# Altium PCB PCB1.PcbDoc
Units mm, origin at the board's own origin, x right, y up, seen from the top; angles counter-clockwise.
Board outline 152.4 x 101.6 mm, 2 copper layers (Top Layer, Bottom Layer); 2 components, 0 nets, 84 pads, 0 vias.
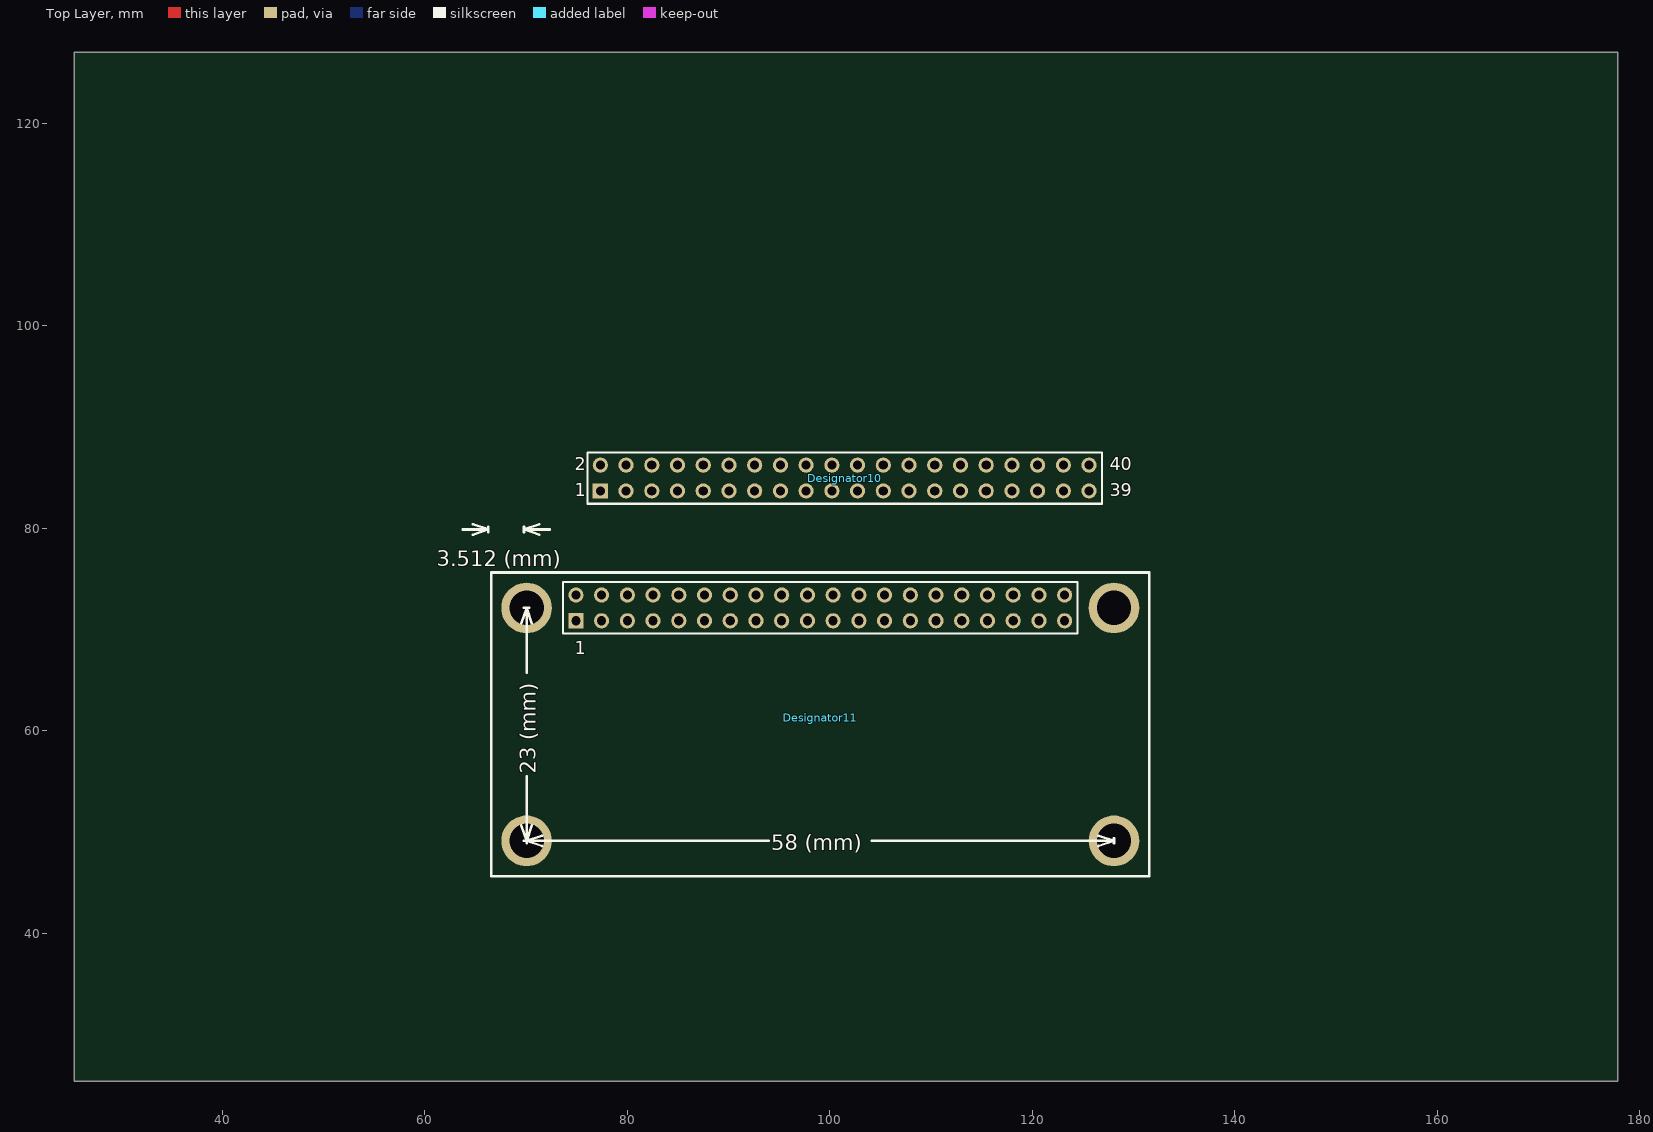
[diagram p0: Top Layer view]
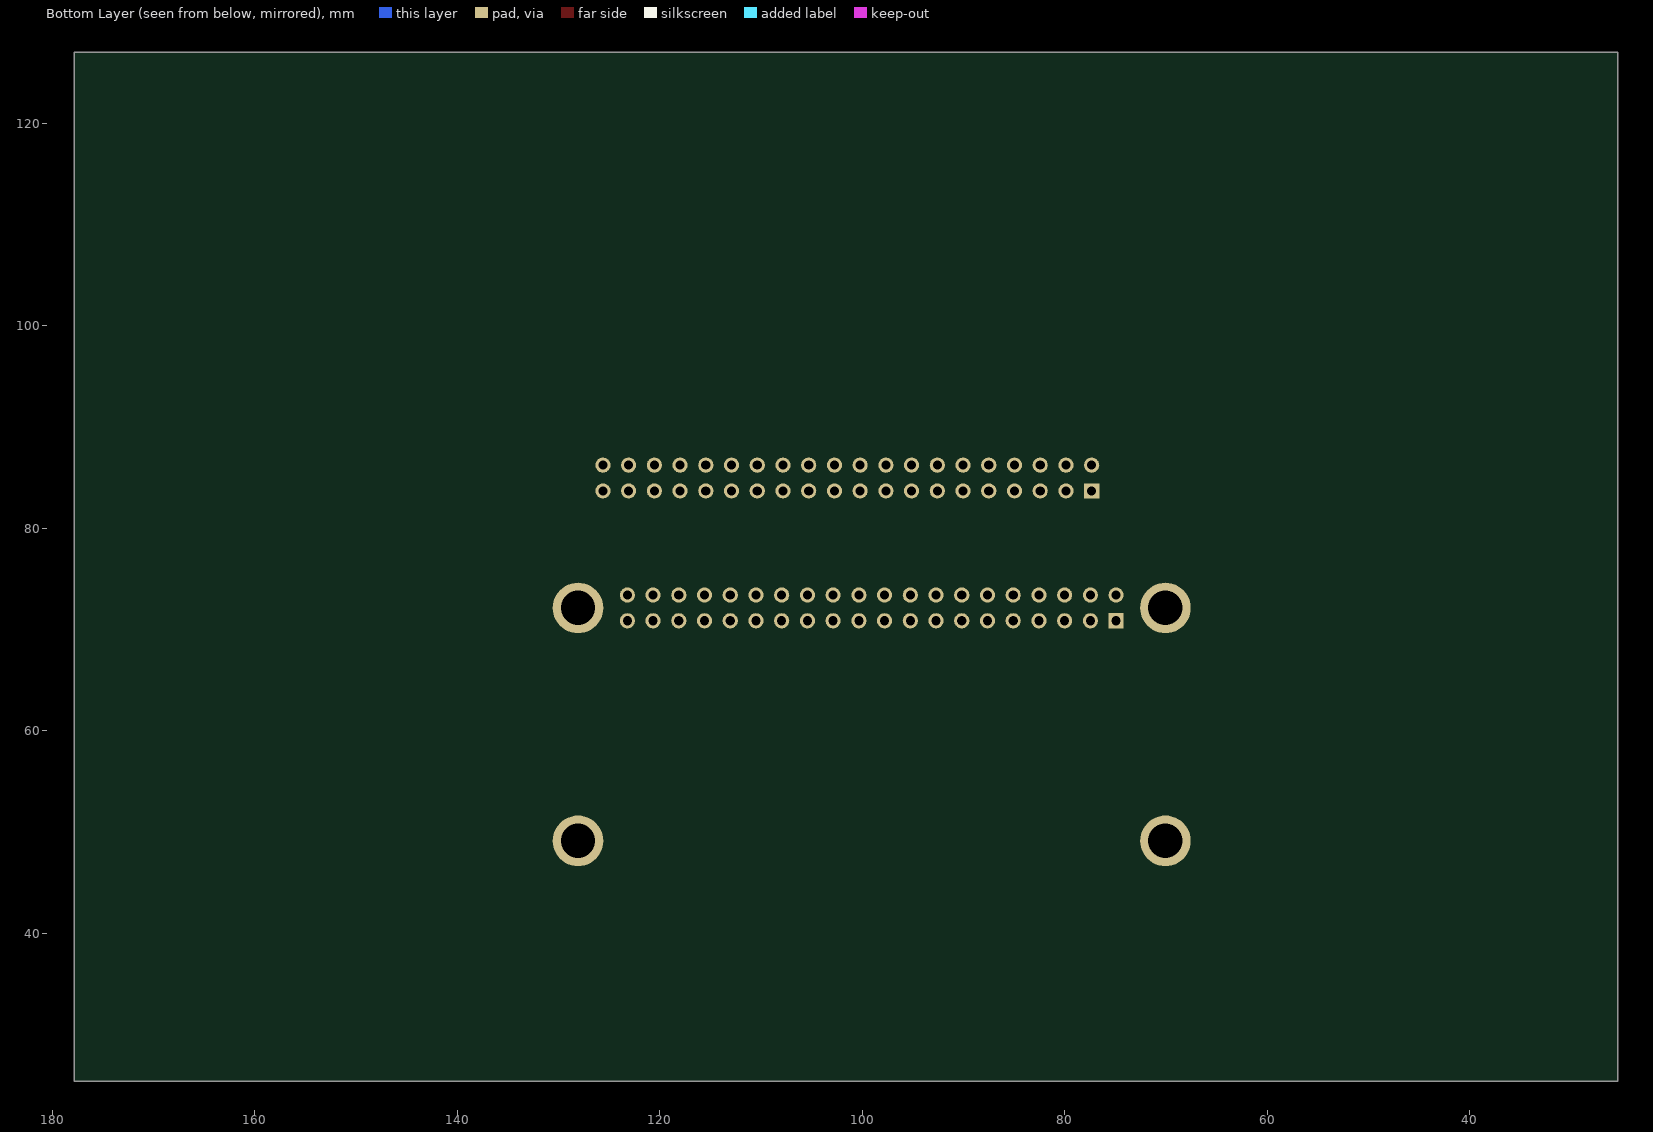
[diagram p1: Bottom Layer view, seen from below]

## Layer stack, top to bottom
Top Solder: solder mask 0.0102, Solder Resist, Dk 3.5
Top Layer: signal copper 0.0356
Dielectric 1: dielectric 0.32, FR-4, Dk 4.8
Bottom Layer: signal copper 0.0356
Bottom Solder: solder mask 0.0102, Solder Resist, Dk 3.5

## Board outline
25.4,25.4 177.8,25.4 177.8,127 25.4,127

## Design rules (kind name [scope] priority, off if disabled: settings)
Clearance [All] p1: gap=0.254 ignorepadtopadclearanceinfootprint=FALSE except(0: Arc-Hole Track-Hole SMDPad-Hole THPad-Hole Via-Hole Fill-Hole Poly-Hole Region-Hole Text-Hole)
PolygonConnect [All] p1: connectstyle=Relief reliefconductorwidth=0.254 reliefentries=4 polygonreliefangle="90 Angle" airgapwidth=0.254
RoutingVias [All] p1: holewidth=0.711 width=1.27 viastyle="Through Hole" minholewidth=0.711 minwidth=1.27 maxholewidth=0.711 maxwidth=1.27
SolderMaskExpansion [All] p1: expansion=0.102
Width [All] p1: maxlimit=0.254 minlimit=0.254 preferedwidth=0.254
30 further rules are at their usual default settings.

## Components (designator, comment, footprint, x,y, rotation, side; value= is the part's Value field where it differs from the comment)
Designator10 "Comment" HDR2X20 77.343,83.693 r0 top
Designator11 "Comment" RPi_Zero_2_W 99.06,72.136 r0 top

## Footprints (in the part's own frame and the unit in brackets; to place one, negate y for a bottom-side part, rotate by r counter-clockwise, add the part's x,y. Pads: shape width x height; smd on the part's side, far side on the other; paste and mask are expansions set on the pad)
HDR2X20 [mm] "Connector; Header; 20x2 Position"
  rect 1.5x1.5 hole 0.9: 1(0,0)
  round 1.5 hole 0.9: 2(0,2.54) 3(2.54,0) 4(2.54,2.54) 5(5.08,0) 6(5.08,2.54) 7(7.62,0) 8(7.62,2.54) 9(10.16,0) 10(10.16,2.54) 11(12.7,0) 12(12.7,2.54) 13(15.24,0) 14(15.24,2.54) 15(17.78,0) 16(17.78,2.54) 17(20.32,0) 18(20.32,2.54) 19(22.86,0) 20(22.86,2.54) 21(25.4,0) 22(25.4,2.54) 23(27.94,0) 24(27.94,2.54) 25(30.48,0) 26(30.48,2.54) 27(33.02,0) 28(33.02,2.54) 29(35.56,0) 30(35.56,2.54) 31(38.1,0) 32(38.1,2.54) 33(40.64,0) 34(40.64,2.54) 35(43.18,0) 36(43.18,2.54) 37(45.72,0) 38(45.72,2.54) 39(48.26,0) 40(48.26,2.54)
  silkscreen extent -1.27,-1.27 49.53,3.81
RPi_Zero_2_W [mm]
  rect 1.5x1.5 hole 0.9: 1(-24.13,-1.27)
  round 5 hole 3.4: 2(-29,0) 3(29,0) 4(-29,-23) 5(29,-23)
  round 1.5 hole 0.9: 2(-24.13,1.27) 3(-21.59,-1.27) 4(-21.59,1.27) 5(-19.05,-1.27) 6(-19.05,1.27) 7(-16.51,-1.27) 8(-16.51,1.27) 9(-13.97,-1.27) 10(-13.97,1.27) 11(-11.43,-1.27) 12(-11.43,1.27) 13(-8.89,-1.27) 14(-8.89,1.27) 15(-6.35,-1.27) 16(-6.35,1.27) 17(-3.81,-1.27) 18(-3.81,1.27) 19(-1.27,-1.27) 20(-1.27,1.27) 21(1.27,-1.27) 22(1.27,1.27) 23(3.81,-1.27) 24(3.81,1.27) 25(6.35,-1.27) 26(6.35,1.27) 27(8.89,-1.27) 28(8.89,1.27) 29(11.43,-1.27) 30(11.43,1.27) 31(13.97,-1.27) 32(13.97,1.27) 33(16.51,-1.27) 34(16.51,1.27) 35(19.05,-1.27) 36(19.05,1.27) 37(21.59,-1.27) 38(21.59,1.27) 39(24.13,-1.27) 40(24.13,1.27)
  silkscreen extent -32.5,-26.5 32.5,3.5

## Nets (pads, with @x,y where several pads share a name; then routed paths per layer and width w, separated by ;. In a path a pad name is that pad's centre, name@x,y a point inside that pad or via, vN(x,y) a via of type N, cw(c..) or ccw(c..) an arc to the next point about the centre after c; other vN are vias at no path point)
pads on no net: Designator10.1 Designator10.2 Designator10.3 Designator10.4 Designator10.5 Designator10.6 Designator10.7 Designator10.8 Designator10.9 Designator10.10 Designator10.11 Designator10.12 Designator10.13 Designator10.14 Designator10.15 Designator10.16 Designator10.17 Designator10.18 Designator10.19 Designator10.20 Designator10.21 Designator10.22 Designator10.23 Designator10.24 Designator10.25 Designator10.26 Designator10.27 Designator10.28 Designator10.29 Designator10.30 Designator10.31 Designator10.32 Designator10.33 Designator10.34 Designator10.35 Designator10.36 Designator10.37 Designator10.38 Designator10.39 Designator10.40 Designator11.1 Designator11.2 Designator11.3 Designator11.4 Designator11.5 Designator11.6 Designator11.7 Designator11.8 Designator11.9 Designator11.10 Designator11.11 Designator11.12 Designator11.13 Designator11.14 Designator11.15 Designator11.16 Designator11.17 Designator11.18 Designator11.19 Designator11.20 Designator11.21 Designator11.22 Designator11.23 Designator11.24 Designator11.25 Designator11.26 Designator11.27 Designator11.28 Designator11.29 Designator11.30 Designator11.31 Designator11.32 Designator11.33 Designator11.34 Designator11.35 Designator11.36 Designator11.37 Designator11.38 Designator11.39 Designator11.40

## Silkscreen, mask and mechanical layers (free items; w line width, h text height)
Top Overlay:
  lines w0.254: 63.754,79.883 66.294,79.883 ; 64.77,79.375 66.294,79.883 ; 64.77,80.391 66.294,79.883 ; 66.294,79.629 66.294,80.137 ; 69.552,50.66 70.06,49.136 ; 69.552,70.612 70.06,72.136 ; 69.806,49.136 70.314,49.136 ; 69.806,72.136 70.314,72.136 ; 69.806,79.629 69.806,80.137 ; 70.06,48.882 70.06,49.39 ; 70.06,55.532 70.06,49.136 ; 70.06,65.74 70.06,72.136 ; 70.568,50.66 70.06,49.136 ; 70.568,70.612 70.06,72.136 ; 71.33,79.375 69.806,79.883 ; 71.33,80.391 69.806,79.883 ; 71.584,48.628 70.06,49.136 ; 71.584,49.644 70.06,49.136 ; 72.346,79.883 69.806,79.883 ; 93.956,49.136 70.06,49.136 ; 104.164,49.136 128.06,49.136 ; 126.536,48.628 128.06,49.136 ; 126.536,49.644 128.06,49.136 ; 128.06,48.882 128.06,49.39
  text "3.512 (mm)" at 61.169,76.226 h1.52
  text "23 (mm)" at 70.974,55.786 h1.52 r90
  text "58 (mm)" at 94.21,48.222 h1.52

## Text inside footprints (layer, text, board x,y; h text height)
Designator10: Top Overlay "1" at 74.803,83.185 h1.27; Top Overlay "2" at 74.803,85.725 h1.27; Top Overlay "40" at 127.635,85.725 h1.27; Top Overlay "39" at 127.635,83.185 h1.27
Designator11: Top Overlay "1" at 74.803,67.564 h1.27